# EAGLE board SHAButton3 (EAGLE 6.5.0)
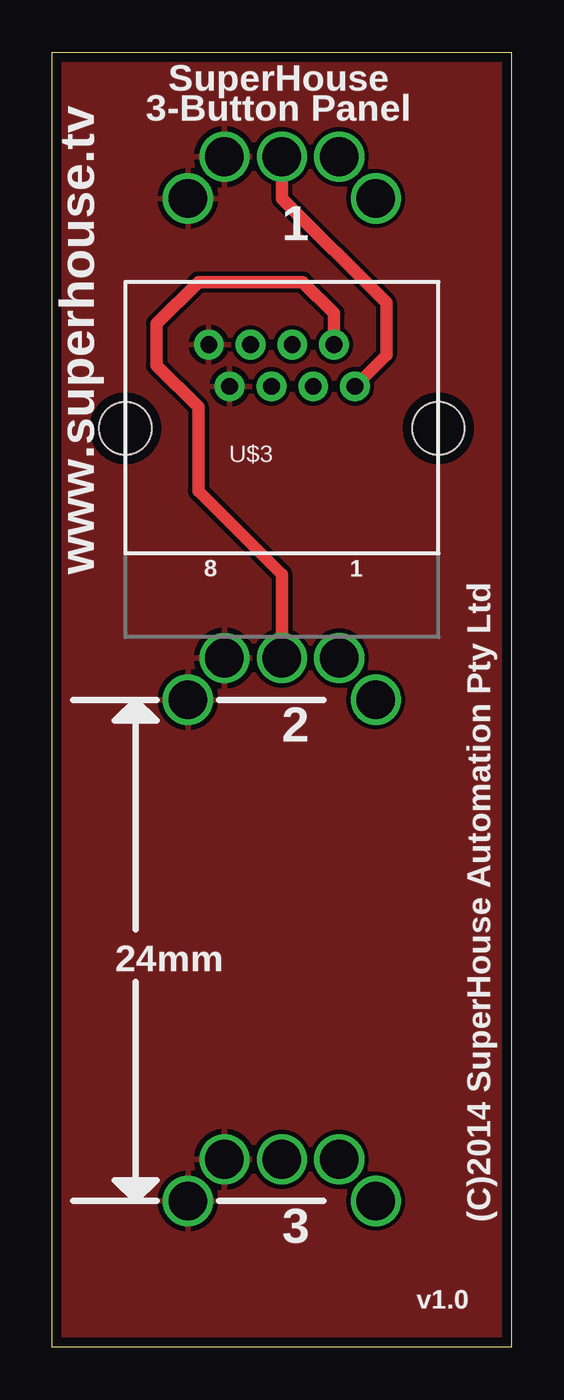
[diagram p0: board, top side]
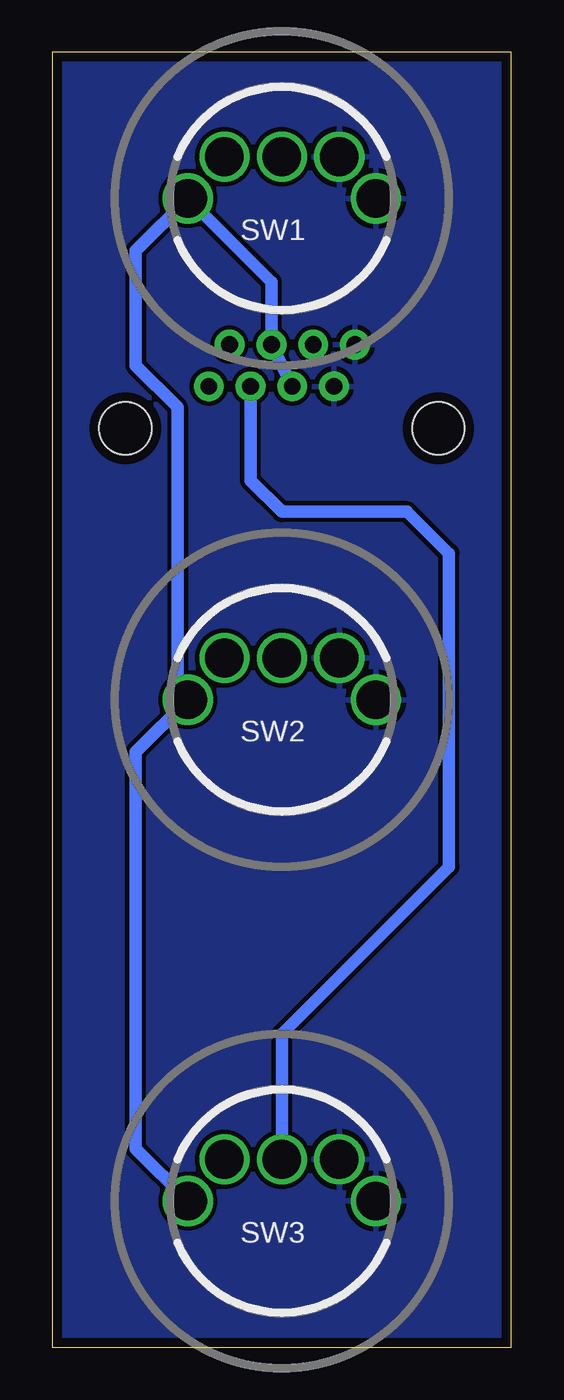
[diagram p1: board, bottom side, seen from below]

Size 22 x 62 mm. Coordinates in mm from the lower left corner, seen from the top.
Outline: 22,0 0,0 0,62 22,62 22,0
Copper layers (1*16): Top 0.035mm / dielectric 1.5mm / Bottom 0.035mm
Design rules "default *": minimum track width 8mil, minimum drill 15mil, track to track 8mil, track to pad 8mil, pad to pad 8mil, via to via 8mil, smd to smd 8mil, copper to edge 18mil, drill to drill 8mil, minimum pad ring 8mil, minimum via ring 6mil, stop-mask expansion 4mil, vias tented up to drill 25mil, thermal gap 10mil
Net classes: 0 Default: width 0.203 mm; 1 VCC: width 0.305 mm

## Footprints (pad centres in the part's own frame; a part is rotated, then mirrored left to right if it is on the bottom)
SWITCH-SPDT-ILLUMINATED = drill 1.85 pad 2.4: 1 -4.5,0; 2 4.5,0; 3 -2.75,2; 4 0,2; 5 2.75,2
RJ45 = drill 0.8 pad 1.422: 1 3.5,2; 2 2.5,4; 3 1.5,2; 4 0.5,4; 5 -0.5,2; 6 -1.5,4; 7 -2.5,2; 8 -3.5,4 | hole 2.5: -7.5,0; 7.5,0

## Placement (x,y rotation side)
SW1  SWITCH-SPDT-ILLUMINATED  [SWITCH-SPDT-ILLUMINATED]  11,55 0 bottom
SW2  SWITCH-SPDT-ILLUMINATED  [SWITCH-SPDT-ILLUMINATED]  11,31 0 bottom
SW3  SWITCH-SPDT-ILLUMINATED  [SWITCH-SPDT-ILLUMINATED]  11,7 0 bottom
U$3  RJ45  [RJ45]  11,44 0 top

## Library data of the parts
SW1-SW3 U$3 = freetronics-jon

## Nets
+12V: SW1.1 SW2.1 SW3.1 U$3.4 U$3.5
GND: SW1.2 SW1.5 SW2.2 SW2.5 SW3.2 SW3.5 U$3.7 U$3.8
N$2: SW3.4 U$3.3
N$4: SW1.4 U$3.1
N$5: SW2.4 U$3.2

## Tracks (layer width: path | path; a pad name or v marks a point on that pad's centre or on a via)
+12V
  Bottom 0.61: U$3.5 U$3.4 11.5,51 SW1.1 18,52.5 18,47 16,45 16,31.5 SW2.1 18,28.5 18,9.5 SW3.1
GND
  pour Top: 22,62 0.04,62 0.04,0 22,0
  pour Bottom: 22,62 0.04,62 0.04,0 22,0
N$2
  Bottom 0.61: SW3.4 11,15 3,23 3,38 5,40 11,40 12.5,41.5 U$3.3
N$4
  Top 0.61: SW1.4 11,55 16,50 16,47.5 U$3.1
N$5
  Top 0.61: U$3.2 13.5,49.5 12,51 7,51 5,49 5,47 7,45 7,41 11,37 SW2.4

## Text on the board
tPlace: SuperHouse / 3-Button Panel | 1 | www.superhouse.tv | 8 | 1 | 2 | 24mm | (C)2014 SuperHouse Automation Pty Ltd | 3 | v1.0